# EAGLE board table_tiles (EAGLE 5.11)
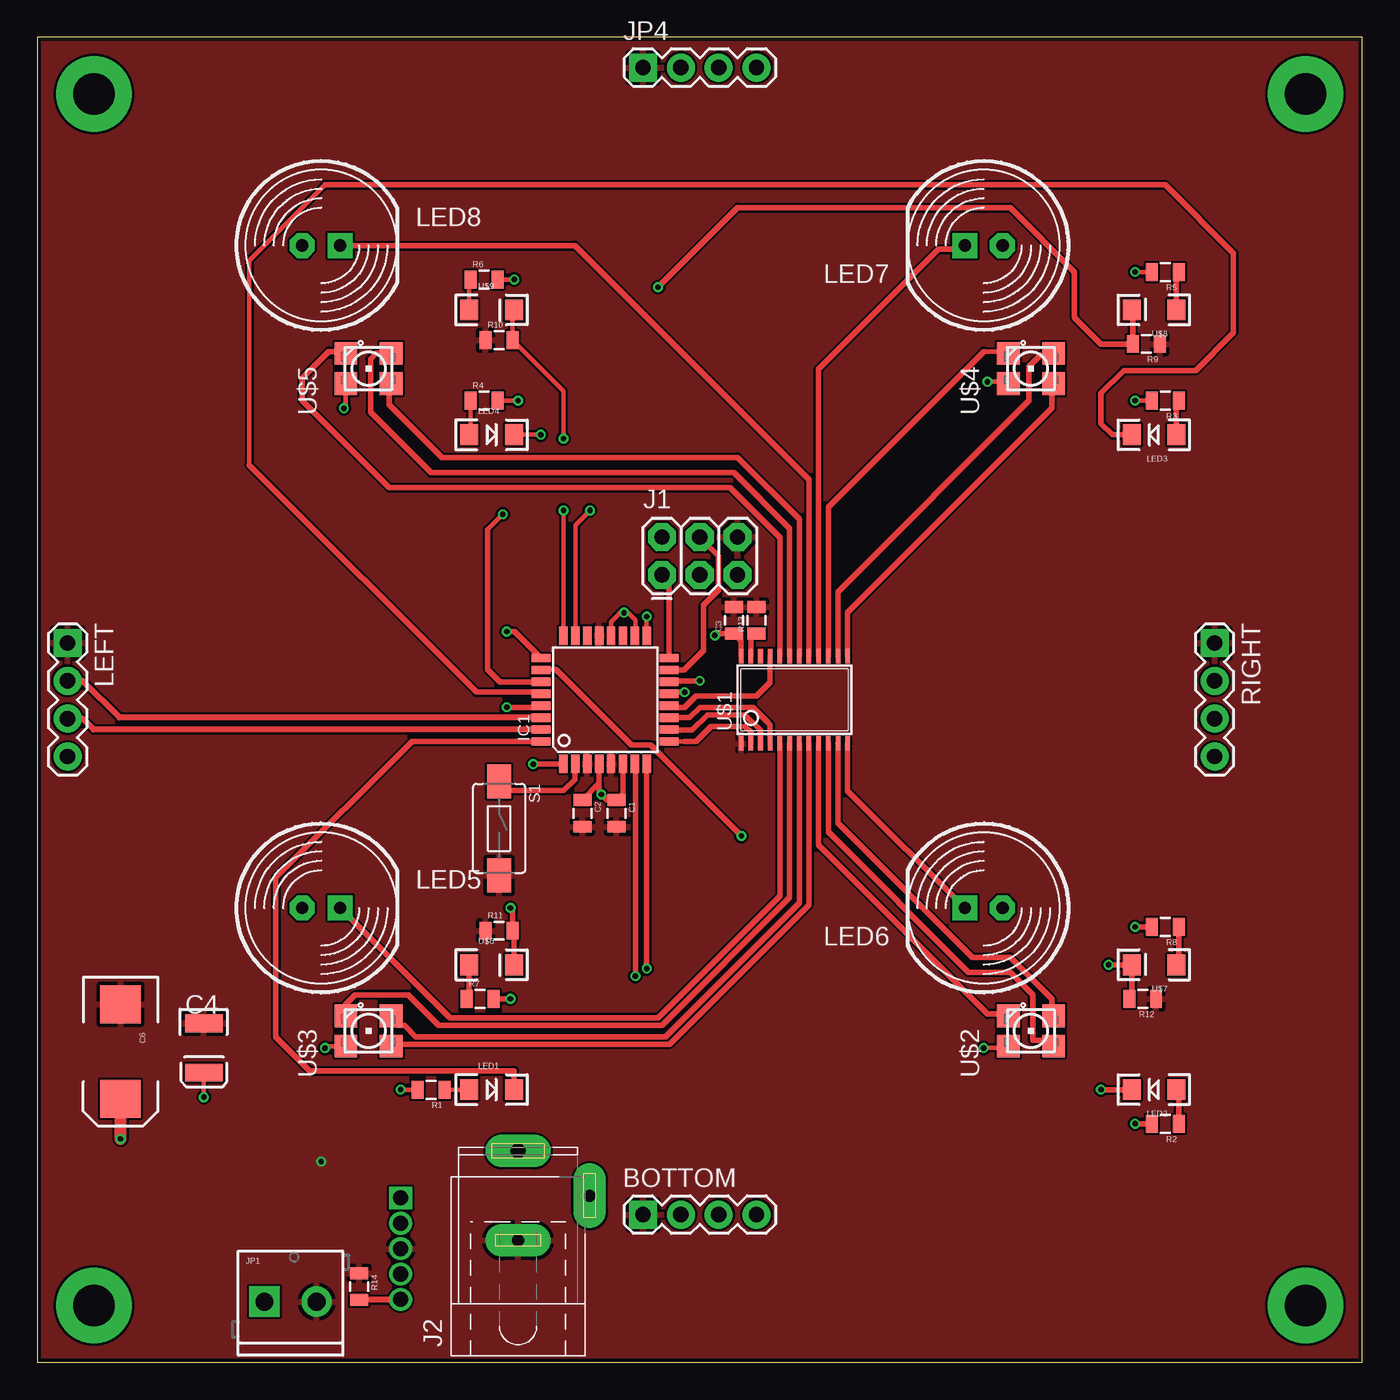
[diagram p0: board, top side]
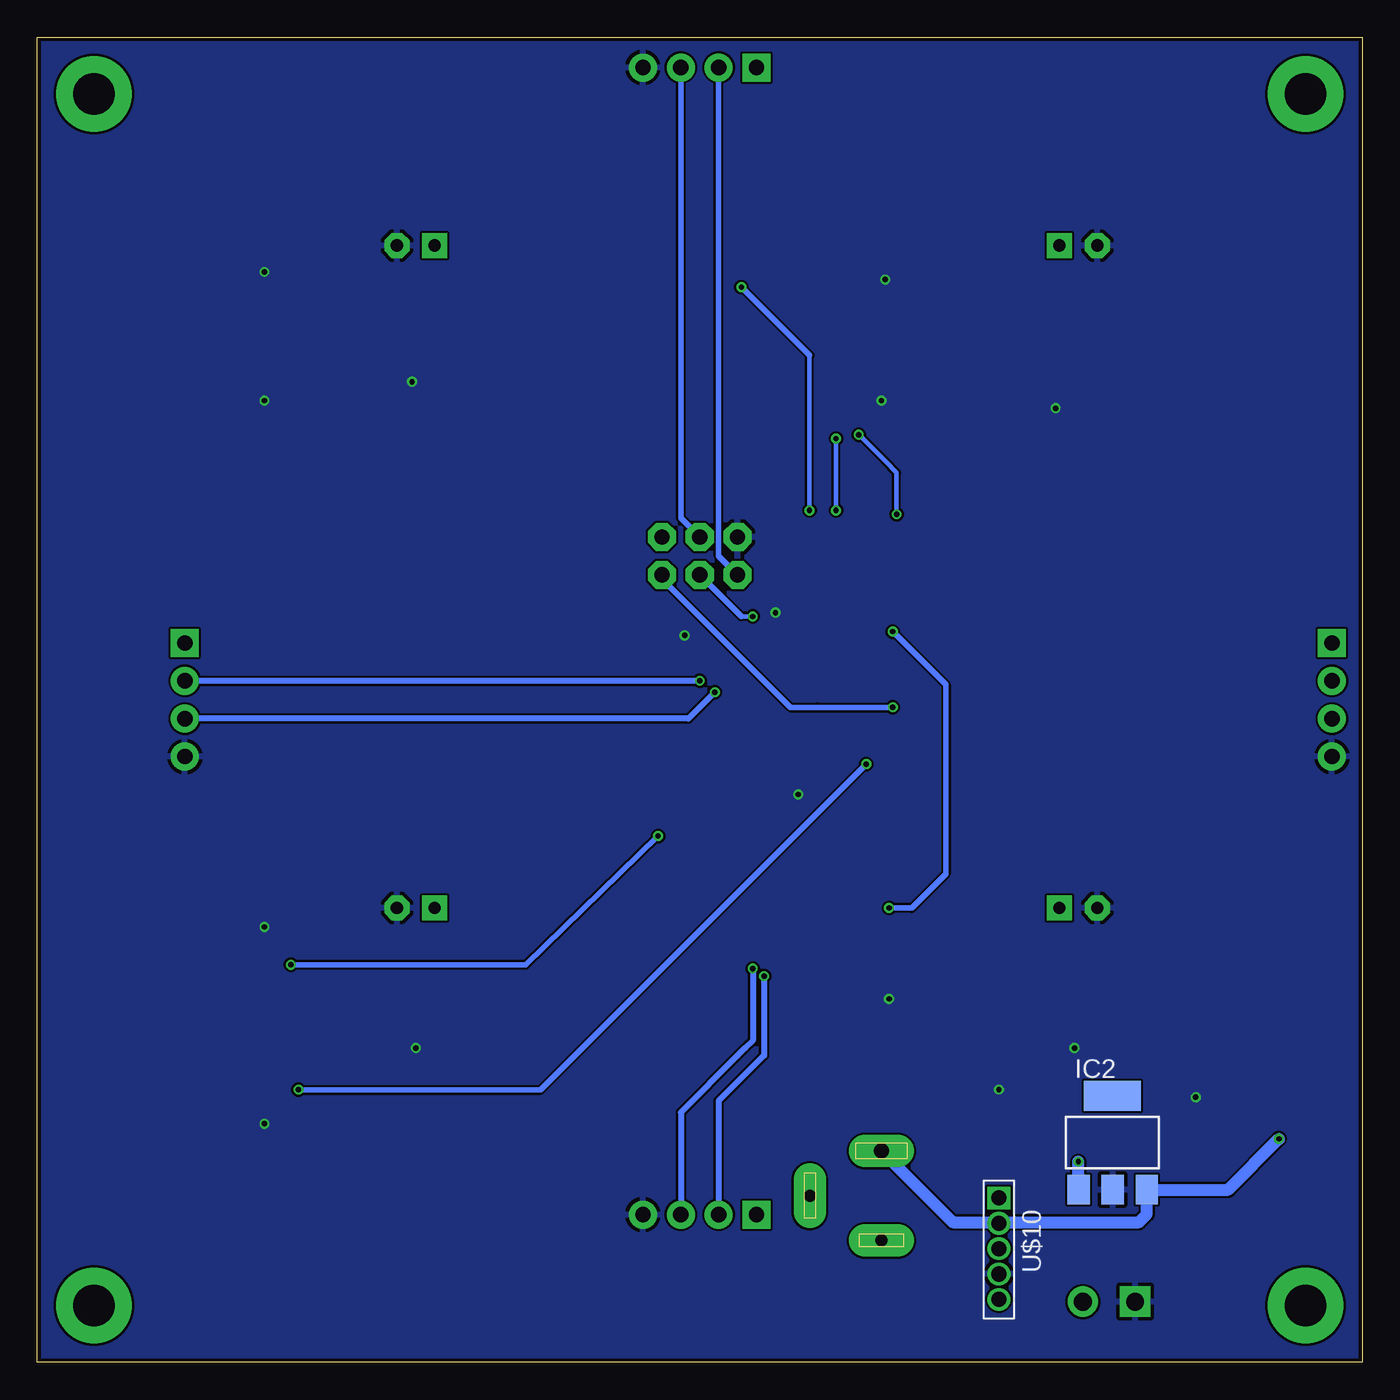
[diagram p1: board, bottom side, seen from below]

Size 88.9 x 88.9 mm. Coordinates in mm from the lower left corner, seen from the top.
Outline: 0,0 88.9,0 88.9,88.9 0,88.9 0,0
Copper layers (1*16): Top 0.035mm / dielectric 1.5mm / Bottom 0.035mm
Design rules "ITead_rule": minimum track width 6mil, minimum drill 12mil, track to track 6mil, track to pad 6mil, pad to pad 6mil, via to via 6mil, smd to smd 0mil, copper to edge 10mil, drill to drill 10mil, minimum pad ring 10mil, minimum via ring 6mil, stop-mask expansion 2mil, vias tented up to drill 100mil, thermal gap 10mil

## Footprints (pad centres in the part's own frame; a part is rotated, then mirrored left to right if it is on the bottom)
1X04 = drill 1.016 pad 1.88 square: 1 0,0 | drill 1.016 pad 1.88 round: 2 2.54,0; 3 5.08,0; 4 7.62,0
0805 = smd 0.8 x 1.2: 1 -0.9,0; 2 0.9,0
EIA3528 = smd 1.2 x 2.5: A 1.65,0; C -1.65,0
EIA7343 = smd 2.55 x 2.7: A 3.17,0; C -3.17,0
TQFP32-08 = smd 1.27 x 0.559: 1 -4.293,2.8; 2 -4.293,2; 3 -4.293,1.2; 4 -4.293,0.4; 5 -4.293,-0.4; 6 -4.293,-1.2; 7 -4.293,-2; 8 -4.293,-2.8; 17 4.293,-2.8; 18 4.293,-2; 19 4.293,-1.2; 20 4.293,-0.4; 21 4.293,0.4; 22 4.293,1.2; 23 4.293,2; 24 4.293,2.8 | smd 0.559 x 1.27: 9 -2.8,-4.293; 10 -2,-4.293; 11 -1.2,-4.293; 12 -0.4,-4.293; 13 0.4,-4.293; 14 1.2,-4.293; 15 2,-4.293; 16 2.8,-4.293; 25 2.8,4.293; 26 2,4.293; 27 1.2,4.293; 28 0.4,4.293; 29 -0.4,4.293; 30 -1.2,4.293; 31 -2,4.293; 32 -2.8,4.293
SOT223 = smd 1.499 x 2.007: 1 -2.261,-3.15; 2 0.025,-3.15; 3 2.311,-3.15 | smd 3.81 x 2.007: 4 0,3.15
2X3 = drill 1.016 pad 1.88 octagon: 1 0,0; 2 0,2.54; 3 2.54,0; 4 2.54,2.54; 5 5.08,0; 6 5.08,2.54
SPC4078 = drill 0.8 pad 2.184 long: 1 -3,0; 2 0,-4.8 | drill 1 pad 2.184 long: 3 3,0
SCREWTERMINAL-3.5MM-2 = drill 1.2 pad 2.032 square: 1 0,0 | drill 1.2 pad 2.032 round: 2 3.5,0
LED-1206 = smd 1.2 x 1.4: A -1.5,0; C 1.5,0
LED10MM = drill 0.813 pad 1.676 octagon: A -1.27,0 | drill 0.813 pad 1.676 square: K 1.27,0
TACTILE-SWITCH-1101NE = smd 2.3 x 1.6: P$1 -3.15,0; P$2 3.15,0
TSSOP24 = smd 0.305 x 0.991: 1 -3.575,-2.918; 2 -2.925,-2.918; 3 -2.275,-2.918; 4 -1.625,-2.918; 5 -0.975,-2.918; 6 -0.325,-2.918; 7 0.325,-2.918; 8 0.975,-2.918; 9 1.625,-2.918; 10 2.275,-2.918; 11 2.925,-2.918; 12 3.575,-2.918; 13 3.575,2.918; 14 2.925,2.918; 15 2.275,2.918; 16 1.625,2.918; 17 0.975,2.918; 18 0.325,2.918; 19 -0.325,2.918; 20 -0.975,2.918; 21 -1.625,2.918; 22 -2.275,2.918; 23 -2.925,2.918; 24 -3.575,2.918
PLCC4 = smd 1.524 x 1.524: 1 -1.524,1.016; 2 -1.524,-1.016; 3 1.524,-1.016; 4 1.524,1.016
PT26-21B = smd 1.2 x 1.4: A -1.5,0; C 1.5,0
SLTS284E = drill 1.016 pad 1.27 square: 1 -3.404,0 | drill 1.016 pad 1.27 round: 2 -1.702,0; 3 0,0; 4 1.702,0 | drill 1.016 round: 5 3.404,0

## Placement (x,y rotation side)
BOTTOM  [1X04]  40.64,9.91 0 top
C1  [0805]  38.86,36.83 270 top
C2  [0805]  36.58,36.83 270 top
C3  [0805]  46.74,49.78 90 top
C4  [EIA3528]  11.18,21.08 270 top
C6  [EIA7343]  5.59,20.83 270 top
IC1  MEGA8-AI  [TQFP32-08]  38.1,44.45 90 top
IC2  REG1117  [SOT223]  16.76,14.73 0 bottom
J1  AVR_SPI_PRG_6PTH  [2X3]  41.91,52.83 0 top
J2  [SPC4078]  32.26,11.18 90 top
JP1  [SCREWTERMINAL-3.5MM-2]  15.24,4.06 0 top
JP4  [1X04]  40.64,86.87 0 top
LED1  [LED-1206]  30.48,18.29 0 top
LED2  [LED-1206]  74.93,18.29 180 top
LED3  [LED-1206]  74.93,62.23 180 top
LED4  [LED-1206]  30.48,62.23 0 top
LED5  [LED10MM]  19.05,30.48 0 top
LED6  [LED10MM]  63.5,30.48 180 top
LED7  [LED10MM]  63.5,74.93 180 top
LED8  [LED10MM]  19.05,74.93 0 top
LEFT  [1X04]  2.03,48.26 270 top
R1  [0805]  26.42,18.29 180 top
R2  [0805]  75.69,16 180 top
R3  [0805]  75.69,64.52 180 top
R4  [0805]  29.97,64.52 0 top
R5  [0805]  75.69,73.15 180 top
R6  [0805]  29.97,72.64 0 top
R7  [0805]  29.72,24.38 0 top
R8  [0805]  75.69,29.21 180 top
R9  [0805]  74.42,68.33 180 top
R10  [0805]  30.99,68.58 0 top
R11  [0805]  30.99,28.96 0 top
R12  [0805]  74.17,24.38 180 top
R13  [0805]  48.26,49.78 90 top
R14  [0805]  21.59,5.08 270 top
RIGHT  [1X04]  78.99,48.26 270 top
S1  SWITCH-MOMENTARY-2-SMD-1101NE  [TACTILE-SWITCH-1101NE]  30.99,35.81 270 top
U$1  STP16CPC26TTR  [TSSOP24]  50.8,44.45 0 top
U$2  CLVBA-FK  [PLCC4]  66.68,22.23 0 top
U$3  CLVBA-FK  [PLCC4]  22.23,22.23 0 top
U$4  CLVBA-FK  [PLCC4]  66.68,66.68 0 top
U$5  CLVBA-FK  [PLCC4]  22.23,66.68 0 top
U$6  PT26-21B  [PT26-21B]  30.48,26.67 0 top
U$7  PT26-21B  [PT26-21B]  74.93,26.67 180 top
U$8  PT26-21B  [PT26-21B]  74.93,70.61 180 top
U$9  PT26-21B  [PT26-21B]  30.48,70.61 0 top
U$10  SLTS284ETI  [SLTS284E]  24.38,7.62 270 bottom

## Library data of the parts
BOTTOM C1-C3 J1 JP1 JP4 LEFT R1-R14 RIGHT S1 = SparkFun
C4 C6 = slice_noshift
IC1 = atmel; MPN: ATMEGA8-16AU; OC_FARNELL: 9171371; OC_NEWARK: 73M8863
IC2 = burr-brown; MPN: REG1117; OC_FARNELL: 1097566; OC_NEWARK: 14P6981
J2 = con-jack; OC_FARNELL: unknown; OC_NEWARK: unknown
LED1-LED4 U$1 U$6-U$9 = table_tiles
LED5-LED8 = led
U$2-U$5 = rf_blinky
U$10 = PWM

## Nets
BOTTOM_IN: BOTTOM.3 IC1.8
BOTTOM_OUT: BOTTOM.2 IC1.7
BUTTON: IC1.2 S1.P$1
CLK: IC1.10 U$1.3
GND: BOTTOM.1 C1.2 C2.2 C3.2 C4.C C6.C IC1.3 IC1.5 IC1.21 IC2.1 J1.6 J2.1 JP1.2 JP4.1 LEFT.1 R9.1 R10.1 R11.1 R12.1 R13.2 R14.1 RIGHT.1 S1.P$2 U$1.1 U$10.3
IR0: IC1.32 LED1.C
IR1: IC1.1 LED2.C
IR2: IC1.28 LED3.C
IR3: IC1.27 LED4.C
LE: IC1.11 U$1.4
LEFT_IN: IC1.31 LEFT.3
LEFT_OUT: IC1.30 LEFT.2
MISO: IC1.16 J1.1 JP4.2
MOSI: IC1.15 J1.4 JP4.3
N$4: R14.2 U$10.5
N$5: LED4.A R4.1
N$6: LED3.A R3.1
N$7: LED2.A R2.1
N$8: LED1.A R1.1
N$9: R5.1 U$8.A
N$10: R6.1 U$9.A
N$11: R7.1 U$6.A
N$12: R8.1 U$7.A
OE: IC1.12 U$1.21
OUT0: LED5.K U$1.5
OUT1: U$1.6 U$3.1
OUT2: U$1.7 U$3.4
OUT3: U$1.8 U$3.3
OUT4: U$1.9 U$2.1
OUT5: U$1.10 U$2.3
OUT6: U$1.11 U$2.4
OUT7: LED6.K U$1.12
OUT8: U$1.13 U$4.3
OUT9: U$1.14 U$4.4
OUT10: U$1.15 U$4.1
OUT11: LED7.K U$1.16
OUT12: LED8.K U$1.17
OUT13: U$1.18 U$5.3
OUT14: U$1.19 U$5.4
OUT15: U$1.20 U$5.1
POWER_IN: C6.A IC2.3 J2.3 U$10.2
REXT: R13.1 U$1.23
RST: IC1.29 J1.5
RT_IN: IC1.14 RIGHT.2
RT_OUT: IC1.13 RIGHT.3
SCK: IC1.17 J1.3
SDI: IC1.9 U$1.2
SDO: U$1.22
SENSOR0: IC1.23 R9.2 U$8.C
SENSOR1: IC1.24 R10.2 U$9.C
SENSOR2: IC1.25 R11.2 U$6.C
SENSOR3: IC1.26 R12.2 U$7.C
VCC: BOTTOM.4 C1.1 C2.1 C3.1 C4.A IC1.4 IC1.6 IC1.18 IC1.20 IC2.2 J1.2 JP1.1 JP4.4 LED5.A LED6.A LED7.A LED8.A LEFT.4 R1.2 R2.2 R3.2 R4.2 R5.2 R6.2 R7.2 R8.2 RIGHT.4 U$1.24 U$2.2 U$3.2 U$4.2 U$5.2 U$10.4

## Tracks (layer width: path | path; a pad name or v marks a point on that pad's centre or on a via)
BOTTOM_IN  (via drill 0.36)
  Top 0.305: IC1.8
  Top 0.356: IC1.8 v40.89,26.42
  Bottom 0.406: v40.89,26.42 40.89,21.59 41.4,21.08 41.91,20.57 45.72,16.76 BOTTOM.3
BOTTOM_OUT  (via drill 0.36)
  Top 0.305: IC1.7 40.13,40.12
  Top 0.356: 40.13,40.12 v40.13,25.91
  Bottom 0.406: v40.13,25.91 40.13,20.57 43.18,17.53 BOTTOM.2
BUTTON
  Top 0.305: IC1.2 36.07,40.12 | 31.24,38.35 30.99,38.61 S1.P$1
  Top 0.356: 36.07,40.12 36.07,39.12 35.31,38.35 31.24,38.35
CLK
  Top 0.305: IC1.10 42.43,42.42 | 48.51,41.54 U$1.3
  Top 0.356: 42.43,42.42 43.94,42.42 44.96,43.43 47.5,43.43 48.51,42.42 48.51,41.54
GND  (via drill 0.36)
  Bottom 0.813: IC2.1 19.05,11.61 v19.05,13.46
  pour Top: -0.51,89.41 89.41,89.41 89.41,-0.51 -0.51,-0.51
IR0
  Top 0.305: 32,18.31 LED1.C
  Top 0.356: 32,18.31 32,19.56 18.29,19.56 16,21.84 16,32.51 25.14,41.65 IC1.32
IR1  (via drill 0.36)
  Top 0.305: 35.28,40.13 IC1.1
  Top 0.356: v33.27,40.13 35.28,40.13 | v71.37,18.29 LED2.C
  Bottom 0.356: v33.27,40.13 55.12,18.29 v71.37,18.29
IR2
  Top 0.305: 19.3,78.99 14.22,73.91 14.22,64.01 14.22,60.2 | 33.7,44.96 IC1.28
  Top 0.356: LED3.C 72.14,62.23 71.37,62.99 71.37,65.02 72.9,66.55 77.72,66.55 80.26,69.09 80.26,74.42 75.69,78.99 19.3,78.99 | 14.22,60.2 29.46,44.96 33.7,44.96
IR3  (via drill 0.36)
  Top 0.305: v31.24,56.9 30.23,55.88 | v33.78,62.23 LED4.C
  Top 0.356: IC1.27 31.06,45.65 30.23,46.48 30.23,55.88
  Bottom 0.305: v33.78,62.23 32,60.45 31.24,59.69 v31.24,56.9
LE
  Top 0.356: IC1.11 43.76,43.25 44.45,43.94 48.01,43.94 49.02,42.93 49.18,42.77 U$1.4
LEFT_IN
  Top 0.406: IC1.31 3.78,42.45 3.05,43.18 LEFT.3
LEFT_OUT
  Top 0.406: IC1.30 5.52,43.25 3.05,45.72 LEFT.2
MISO
  Top 0.356: IC1.16 42.39,52.35 J1.1
  Bottom 0.356: J1.1 43.18,54.1 JP4.2
MOSI
  Top 0.356: IC1.15 43.4,46.45 44.7,47.75 44.7,50.8 45.72,51.82 45.72,54.1 J1.4
  Bottom 0.356: JP4.3 45.72,56.64 J1.4
N$1  (via drill 2.8 pad 5.08)
  other vias: 3.81,3.81
N$2  (via drill 2.8 pad 5.08)
  other vias: 3.81,85.09
N$3  (via drill 2.8 pad 5.08)
  other vias: 85.09,85.09
N$4
  Top 0.406: R14.2 24.38,4.18 U$10.5
N$5
  Top 0.305: LED4.A 29.07,62.32 R4.1
N$6
  Top 0.305: 76.43,64.35 R3.1
  Top 0.356: LED3.A 76.43,64.35
N$7
  Top 0.305: 76.59,18.13 LED2.A
  Top 0.356: R2.1 76.59,18.13
N$8
  Top 0.305: LED1.A R1.1
N$9
  Top 0.305: 76.43,72.99 R5.1
  Top 0.356: U$8.A 76.43,72.99
N$10
  Top 0.305: R6.1 28.98,72.55 U$9.A
N$11
  Top 0.356: U$6.A 28.98,24.55 R7.1
N$12
  Top 0.305: U$7.A 76.59,26.83
  Top 0.356: 76.59,26.83 R8.1
N$13  (via drill 2.8 pad 5.08)
  other vias: 85.09,3.81
OE
  Top 0.305: IC1.12 42.5,43.94
  Top 0.356: 42.5,43.94 43.43,43.94 44.2,44.7 48.26,44.7 49.18,45.62 U$1.21
OUT0
  Top 0.356: U$1.5 49.83,31.28 41.66,23.11 27.69,23.11 LED5.K
OUT1
  Top 0.356: U$1.6 50.48,31.17 41.91,22.61 26.92,22.61 24.89,24.64 21.34,24.64 20.7,24 U$3.1
OUT2
  Top 0.305: 23.75,23.11 U$3.4
  Top 0.356: 23.75,23.11 24.26,22.61 24.64,22.61 25.4,21.84 42.16,21.84 51.12,30.81 U$1.7
OUT3
  Top 0.305: 23.88,21.34 U$3.3
  Top 0.356: 23.88,21.34 42.42,21.34 51.78,30.69 U$1.8
OUT4
  Top 0.305: U$2.1 65.02,23.37
  Top 0.356: U$1.9 52.43,34.7 63.75,23.37 65.02,23.37
OUT5
  Top 0.305: U$2.3 67.82,21.59
  Top 0.356: U$1.10 53.08,35.57 62.48,26.16 65.28,26.16 66.8,24.64 66.8,21.59 67.82,21.59
OUT6
  Top 0.305: 68.07,23.37 U$2.4
  Top 0.356: U$1.11 53.73,36.19 62.74,27.18 65.28,27.18 68.07,24.38 68.07,23.37
OUT7
  Top 0.356: U$1.12 54.38,38.34 LED6.K
OUT8
  Top 0.305: 68.07,65.53 U$4.3
  Top 0.356: U$1.13 54.38,50.31 68.07,64.01 68.07,65.53
OUT9
  Top 0.305: 67.31,67.56 68.07,67.56 U$4.4
  Top 0.356: U$1.14 53.73,51.69 66.55,64.52 66.55,66.8 67.31,67.56
OUT10
  Top 0.305: 63.5,67.82 65.02,67.82 U$4.1
  Top 0.356: U$1.15 53.08,57.39 63.5,67.82
OUT11
  Top 0.356: U$1.16 52.43,66.65 60.45,74.68 61.98,74.68 LED7.K
OUT12
  Top 0.356: U$1.17 51.78,59.22 36.07,74.93 LED8.K
OUT13
  Top 0.305: U$5.3 23.62,65.53
  Top 0.356: U$1.18 51.12,56.57 46.99,60.71 27.18,60.71 23.62,64.26 23.62,65.53
OUT14
  Top 0.356: U$1.19 50.48,55.95 46.74,59.69 26.42,59.69 22.35,63.75 22.35,67.31 22.73,67.69 U$5.4
OUT15
  Top 0.356: U$1.20 49.83,55.33 46.48,58.67 23.62,58.67 17.78,64.52 17.78,66.04 19.56,67.82 20.57,67.82 U$5.1
POWER_IN  (via drill 0.36)
  Top 0.813: v5.59,14.99 C6.A
  Bottom 0.813: v5.59,14.99 8.99,11.58 IC2.3 14.45,9.93 14.99,9.4 24.38,9.4 | 24.38,9.4 U$10.2 | 24.38,9.4 27.48,9.4 J2.3
REXT
  Top 0.356: U$1.23 47.88,48.5 R13.1
RST  (via drill 0.36)
  Top 0.305: 33.7,43.94 IC1.29
  Top 0.356: v31.5,43.94 33.7,43.94
  Bottom 0.356: v31.5,43.94 36.58,43.94 38.35,43.94 46.74,52.32 46.74,52.58 J1.5
RT_IN  (via drill 0.36)
  Top 0.305: IC1.14 42.46,45.72
  Top 0.356: 42.46,45.72 v44.45,45.72
  Bottom 0.406: v44.45,45.72 RIGHT.2
RT_OUT  (via drill 0.36)
  Top 0.305: IC1.13 42.5,44.96
  Top 0.356: 42.5,44.96 v43.43,44.96
  Bottom 0.406: v43.43,44.96 45.21,43.18 RIGHT.3
SCK  (via drill 0.36)
  Top 0.305: IC1.17 v40.89,50.04
  Bottom 0.305: v40.89,50.04 41.66,50.04
  Bottom 0.356: 41.66,50.04 J1.3
SDI
  Top 0.305: IC1.9 43.43,41.66 | 47.5,42.67 47.24,42.67
  Top 0.356: 43.43,41.66 44.2,41.66 45.21,42.67 47.24,42.67 | 47.5,42.67 47.88,42.3 U$1.2
SENSOR0  (via drill 0.36)
  Top 0.305: 73.52,70.52 U$8.C | v37.08,57.15 36.1,56.17 IC1.23
  Top 0.356: 73.52,70.52 R9.2 71.37,68.33 69.6,70.1 69.6,73.15 65.28,77.47 46.99,77.47 v41.66,72.14
  Bottom 0.305: v37.08,57.15 37.08,67.56
  Bottom 0.356: 37.08,67.56 v41.66,72.14
SENSOR1  (via drill 0.36)
  Top 0.305: U$9.C 31.89,70.52 R10.2 35.31,65.16 v35.31,61.98 | IC1.24 v35.3,57.14 v35.31,57.15
  Bottom 0.305: v35.31,57.15 v35.31,61.98
SENSOR2  (via drill 0.36)
  Top 0.305: R11.2 31.98,28.86 | v31.75,30.48 31.89,30.34
  Top 0.356: 31.98,28.86 U$6.C | IC1.25 32.04,49.02 v31.5,49.02 | 31.89,30.34 R11.2
  Bottom 0.356: v31.5,49.02 27.94,45.47 27.94,32.77 30.23,30.48 v31.75,30.48
SENSOR3  (via drill 0.36)
  Top 0.305: 73.43,24.55 R12.2 | IC1.26 33.84,46.48 34.8,46.48
  Top 0.356: 73.43,24.55 U$7.C v71.88,26.67 | 34.8,46.48 39.88,41.4 41.15,41.4 v47.24,35.31
  Bottom 0.356: v47.24,35.31 56.13,26.67 v71.88,26.67
VCC  (via drill 0.36)
  Top 0.305: v63.75,65.79 65.02,65.79 U$4.2 | v20.57,64.01 20.7,64.14 U$5.2 | R4.2 v32.26,64.52 | R6.2 v32,72.64 | R5.2 v73.66,73.15 | R3.2 v73.66,64.52 | v63.5,21.08 65.02,21.08 U$2.2 | IC1.18 40.13,48.78 40.13,49.78 39.62,50.29 v39.37,50.29 39.12,50.29 38.86,50.04 38.5,49.68 IC1.20 | v19.3,21.08 19.43,21.21 U$3.2 | R1.2 v24.38,18.29 | IC1.4 37.7,39.62 37.7,38.85 | 39.3,38.17 C1.1 | C4.A v11.18,17.78
  Top 0.356: U$1.24 47.23,48.4 C3.1 45.58,48.88 v45.47,48.77 | R8.2 v73.66,29.21 | R2.2 v73.66,16 | 37.7,38.85 C2.1 | IC1.6 39.3,38.17 | C1.1 38.22,37.73 v37.85,38.1 37.7,38.25 37.7,39.62 | R7.2 v31.75,24.38
  pour Bottom: -0.51,89.92 89.92,89.92 89.92,-1.52 -0.51,-1.52